# Altium PCB 32-085PCB图（源文件格式）.PcbDoc
Units mil, origin at the board's own origin, x right, y up, seen from the top; angles counter-clockwise.
Board outline 3930 x 3915 mil, 2 copper layers (Top Layer, Bottom Layer); 30 components, 49 nets, 127 pads, 0 vias.
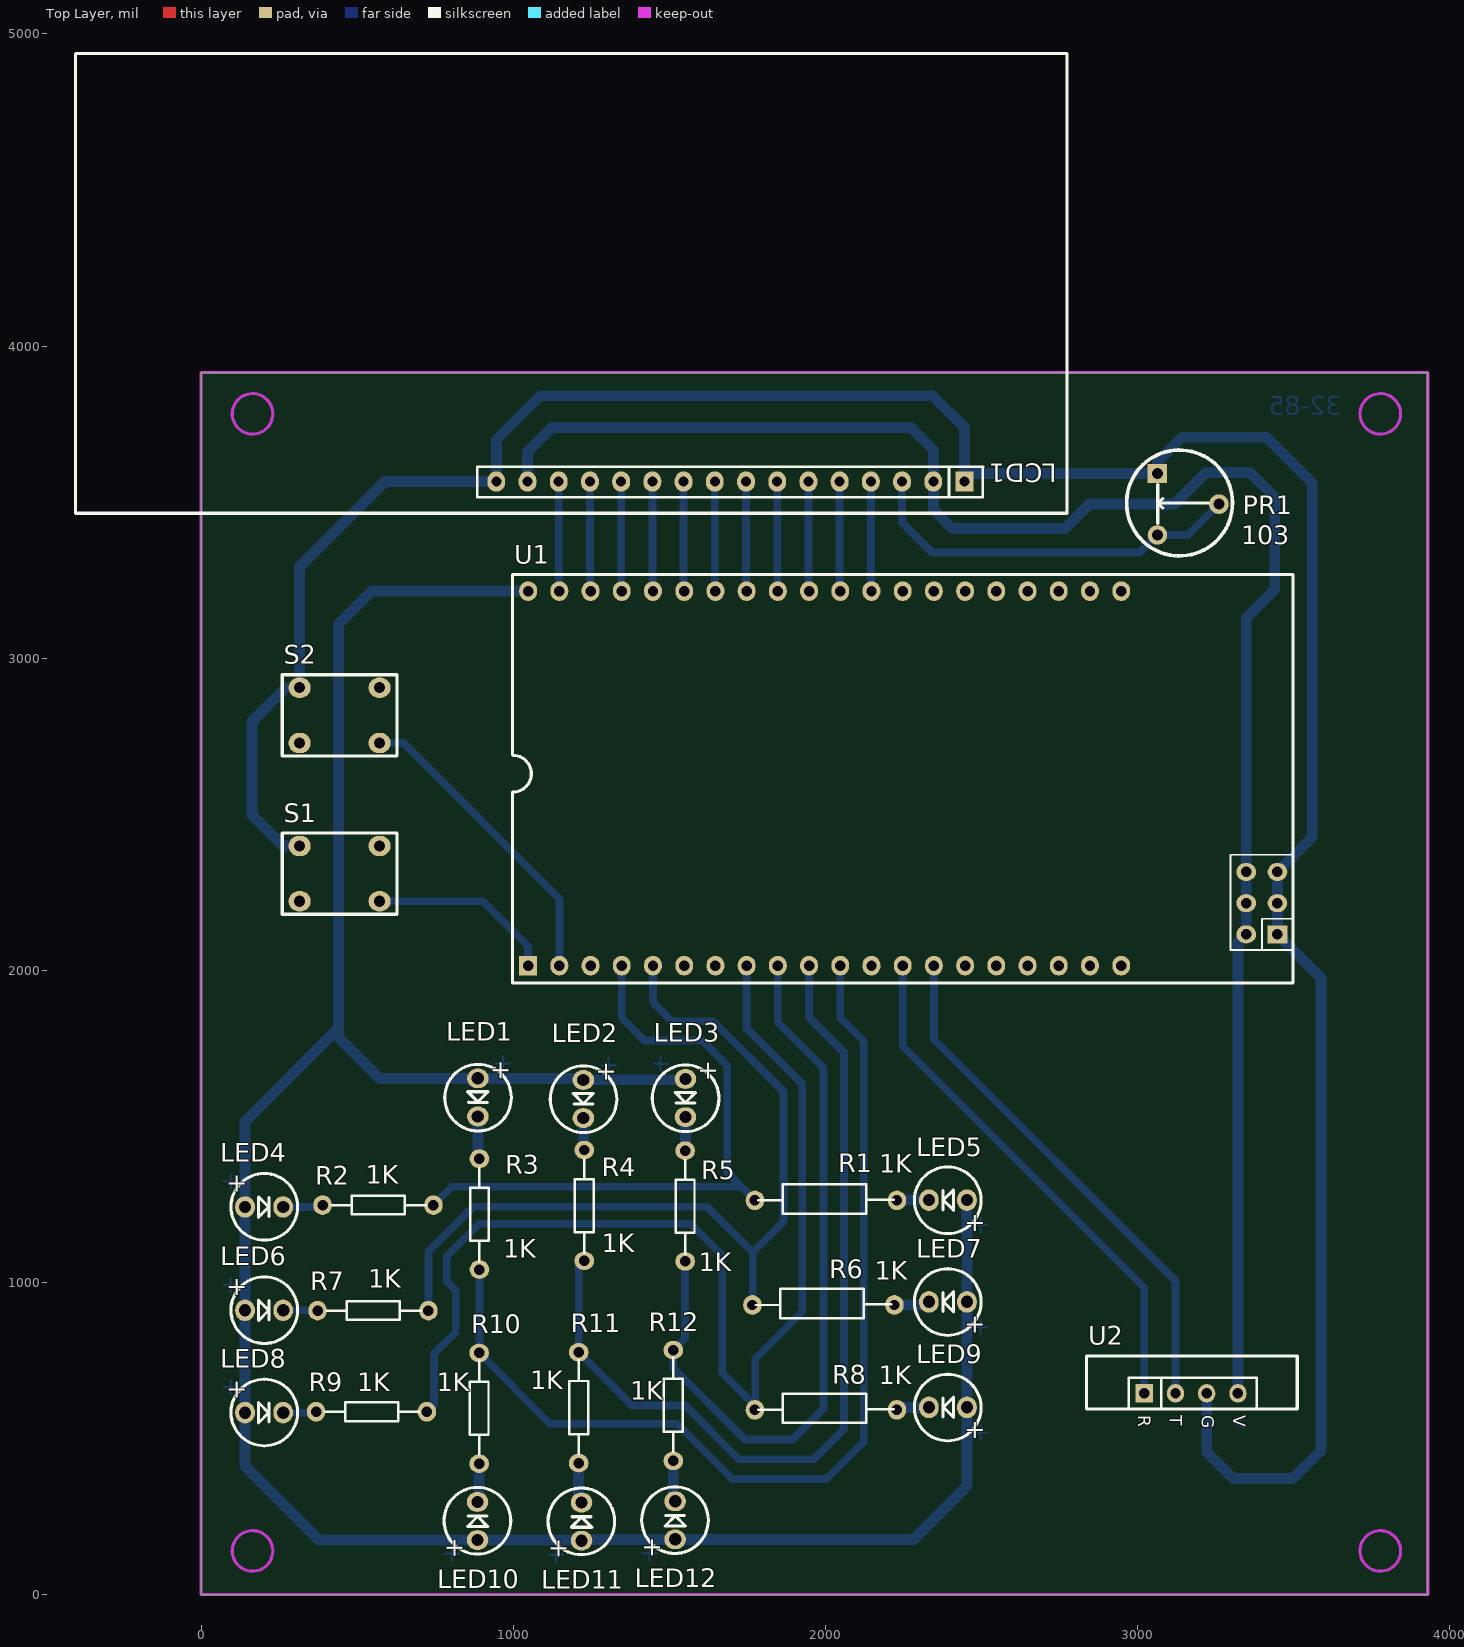
[diagram p0: Top Layer view]
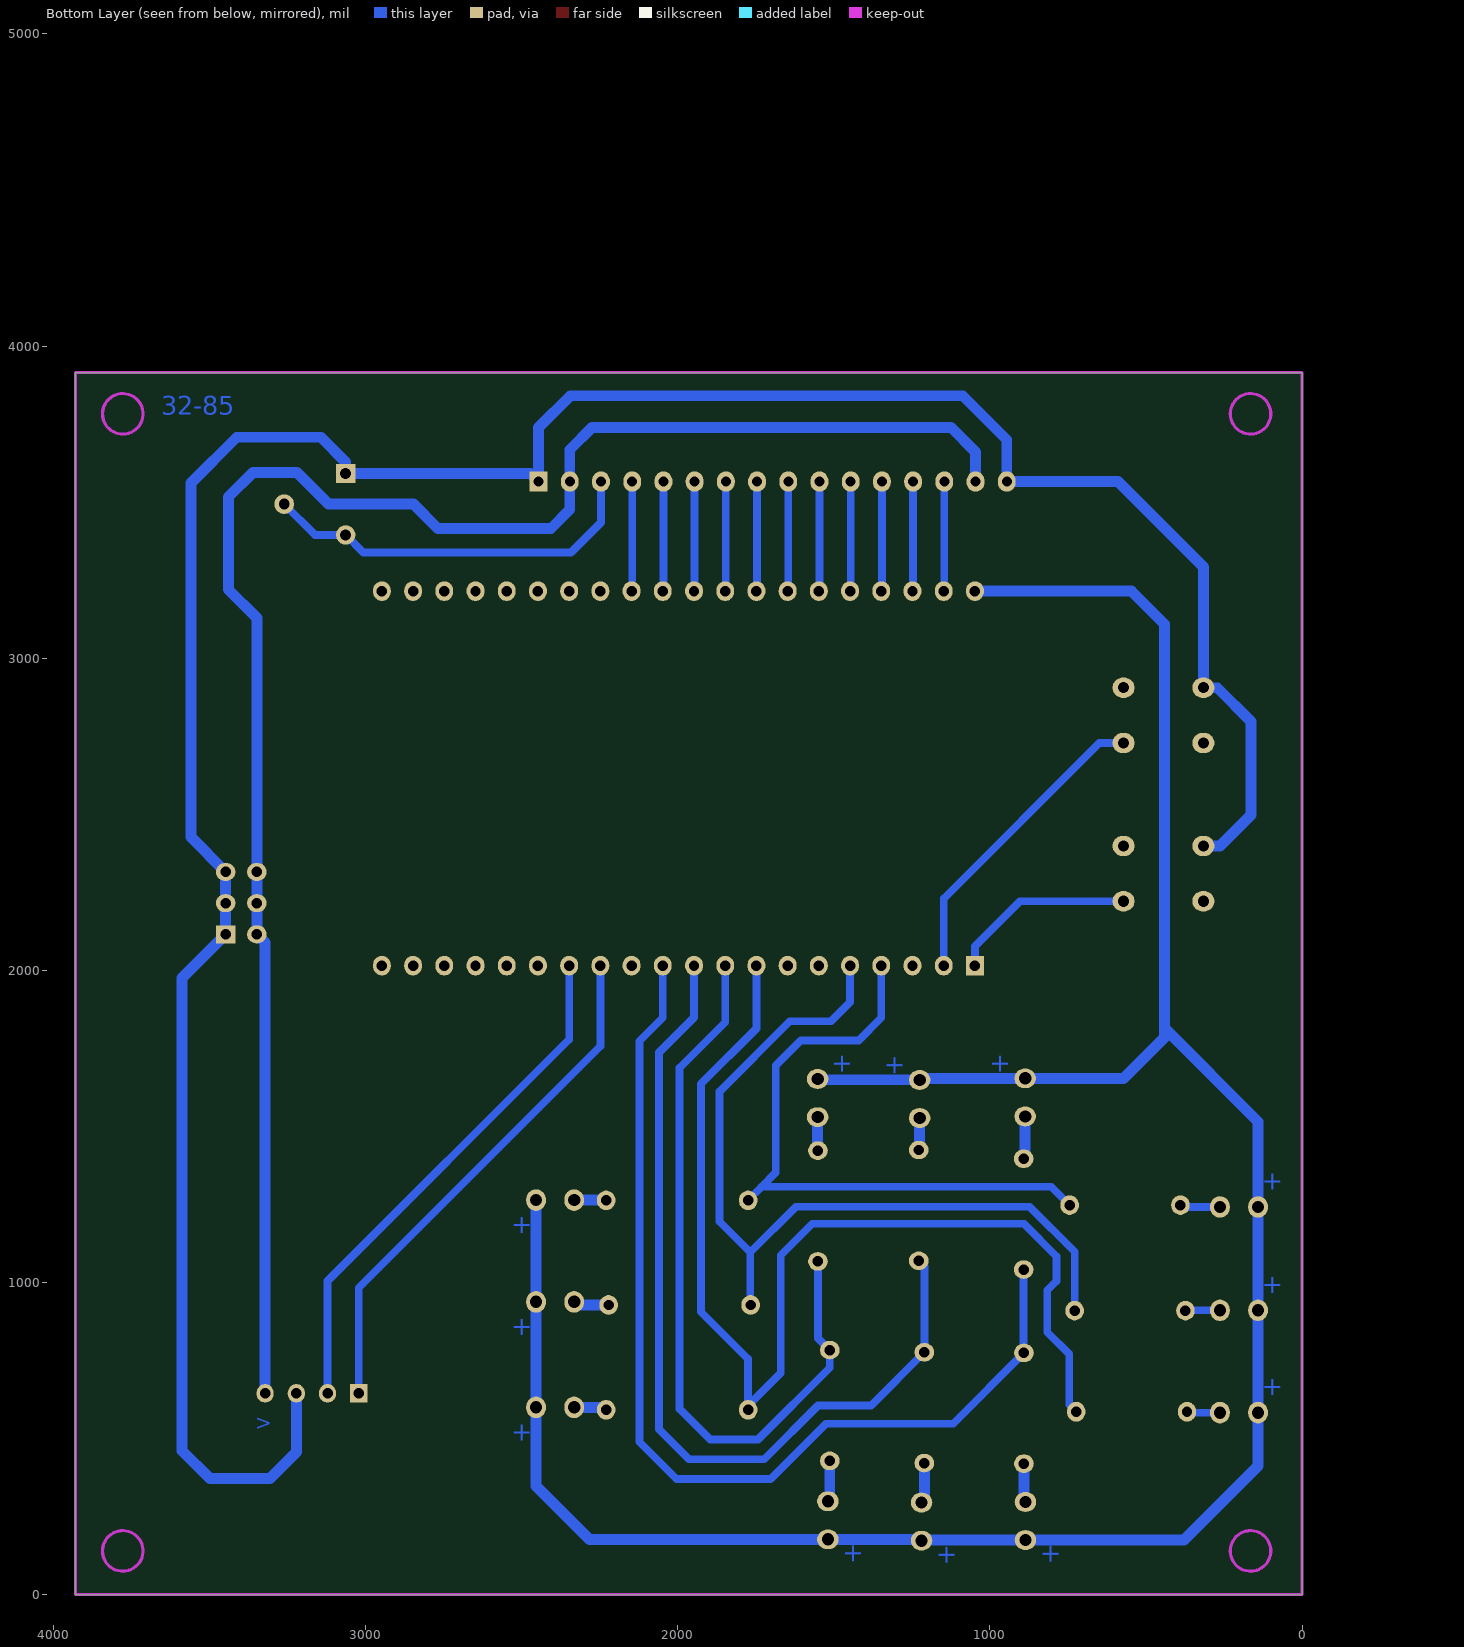
[diagram p1: Bottom Layer view, seen from below]

## Layer stack, top to bottom
Top Solder: solder mask 0.4, Solder Resist, Dk 3.5
Top Layer: signal copper 1.4
Dielectric1: dielectric 12.6, FR-4, Dk 4.8
Bottom Layer: signal copper 1.4
Bottom Solder: solder mask 0.4, Solder Resist, Dk 3.5

## Board outline
0,0 0,3915 3930,3915 3930,0

## Design rules (kind name [scope] priority, off if disabled: settings)
Clearance [All] p1: gap=12
ComponentClearance [All] p1 off: gap=10 collisioncheckmode=3 verticalgap=10 showdistances=FALSE
FabricationTestpoint [(IsPad And (OnTopLayer Or OnBottomLayer))] p1: side=3 testpointundercomponent=TRUE minsize=40 maxsize=100 preferedsize=60 minholesize=0 maxholesize=40 preferedholesize=32 testpointgrid=1 allowsidetop=TRUE allowsidebottom=TRUE usegrid=TRUE gridtolerance=0.01
Height [All] p1 off: minheight=0 maxheight=1000 prefheight=500
HoleSize [All] p1 off: absolutevalues=TRUE maxlimit=100 minlimit=1 maxpercent=80.000 minpercent=20.000
LayerPairs [All] p1 off: enforce=TRUE
PlaneClearance [All] p1 off: clearance=20
PlaneConnect [All] p1 off: planeconnectstyle=Relief reliefexpansion=20 reliefentries=4 reliefconductorwidth=10 reliefairgap=10
PolygonConnect [All] p1 off: connectstyle=Relief reliefconductorwidth=10 reliefentries=4 polygonreliefangle="90 Angle" airgapwidth=10
RoutingVias [All] p1: holewidth=28 width=50 viastyle="Through Hole" minholewidth=28 minwidth=50 maxholewidth=28 maxwidth=50
SilkToSolderMaskClearance SilkscreenOverComponentPads [IsPad] p1: minsilkscreentomaskgap=10 clearancetoexposedcopper=TRUE
SolderMaskExpansion [All] p1: expansion=4
Width [All] p1: maxlimit=100 minlimit=12 preferedwidth=20
22 further rules are at their usual default settings.

## Components (designator, comment, footprint, x,y, rotation, side; value= is the part's Value field where it differs from the comment)
LCD1 "LCD1602" LCD1602 2446,3566 r180 top
LED1 "GREEN" LED_D3MM12 887,1654 r270 top
LED2 "YELLOW" LED_D3MM12 1225,1649 r270 top
LED3 "RED" LED_D3MM12 1552,1652 r270 top
LED4 "GREEN" LED_D3MM12 141,1242 r0 top
LED5 "GREEN" LED_D3MM12 2454,1264 r180 top
LED6 "YELLOW" LED_D3MM12 141,911 r0 top
LED7 "YELLOW" LED_D3MM12 2454,938 r180 top
LED8 "RED" LED_D3MM12 141,583 r0 top
LED9 "RED" LED_D3MM12 2454,600 r180 top
LED10 "GREEN" LED_D3MM12 886,175 r90 top
LED11 "YELLOW" LED_D3MM12 1219,173 r90 top
LED12 "RED" LED_D3MM12 1519,177 r90 top
PR1 "103" WH06-2 3064,3592 r270 top
R1 "1K" AXIAL0.4 2002,1263 r0 top
R2 "1K" AXIAL0.3 567,1248 r180 top
R3 "1K" AXIAL0.3 892,1219 r90 top
R4 "1K" AXIAL0.3 1228,1247 r90 top
R5 "1K" AXIAL0.3 1551,1245 r90 top
R6 "1K" AXIAL0.4 1994,928 r0 top
R7 "1K" AXIAL0.3 551,910 r180 top
R8 "1K" AXIAL0.4 2002,592 r0 top
R9 "1K" AXIAL0.3 546,586 r180 top
R10 "1K" AXIAL0.3 891,597 r270 top
R11 "1K" AXIAL0.3 1210,599 r270 top
R12 "1K" AXIAL0.3 1513,606 r270 top
S1 "BUTTOM" BUTTOM_6x6DIP 444,2310 r0 top
S2 "BUTTOM" BUTTOM_6x6DIP 444,2817 r0 top
U1 "STM32_CORE" STM32_CORE 1048,2015 r90 top
U2 "预留串口" 蓝牙MODE竖放 3022,645 r270 top

## Footprints (in the part's own frame and the unit in brackets; to place one, negate y for a bottom-side part, rotate by r counter-clockwise, add the part's x,y. Pads: shape width x height; smd on the part's side, far side on the other; paste and mask are expansions set on the pad)
AXIAL0.3 [mm]
  oval 1.5x1.6 hole 0.85: 1(-4.508,0) 2(4.508,0)
  silkscreen extent -3.87,-0.76 3.75,0.76
AXIAL0.4 [mm]
  oval 1.5x1.6 hole 0.85: 1(-5.779,0) 2(5.779,0)
  silkscreen extent -5.52,-1.07 5.52,1.32
BUTTOM_6x6DIP [mm]
  oval 1.8x1.65 hole 0.9: 1(-3.25,2.25) 2(3.25,-2.25) ""(-3.25,-2.25) ""(3.25,2.25)
  round 1 on Top Overlay: 3(0,0)
  silkscreen extent -4.67,-3.3 4.67,3.3
LCD1602 [mm]
  rect 1.45x1.65 hole 0.813: 1(0,0)
  oval 1.45x1.65 hole 0.813: 2(2.54,0) 3(5.08,0) 4(7.62,0) 5(10.16,0) 6(12.7,0) 7(15.24,0) 8(17.78,0) 9(20.32,0) 10(22.86,0) 11(25.4,0) 12(27.94,0) 13(30.48,0) 14(33.02,0) 15(35.56,0) 16(38.1,0)
  silkscreen extent -8.33,-34.85 72.35,2.58
LED_D3MM12 [mm]
  oval 1.6x1.75 hole 1: 1(0,0) 2(3.1,0)
  silkscreen extent -1.14,-2.7 4.28,2.72
STM32_CORE [mm]
  rect 1.6x1.45 hole 0.85: 1(0,0)
  oval 1.6x1.45 hole 0.85: 2(0,-2.54) 3(0,-5.08) 4(0,-7.62) 5(0,-10.16) 6(0,-12.7) 7(0,-15.24) 8(0,-17.78) 9(0,-20.32) 10(0,-22.86) 11(0,-25.4) 12(0,-27.94) 13(0,-30.48) 14(0,-33.02) 15(0,-35.56) 16(0,-38.1) 17(0,-40.64) 18(0,-43.18) 19(0,-45.72) 20(0,-48.26) 21(30.48,-48.26) 22(30.48,-45.72) 23(30.48,-43.18) 24(30.48,-40.64) 25(30.48,-38.1) 26(30.48,-35.56) 27(30.48,-33.02) 28(30.48,-30.48) 29(30.48,-27.94) 30(30.48,-25.4) 31(30.48,-22.86) 32(30.48,-20.32) 33(30.48,-17.78) 34(30.48,-15.24) 35(30.48,-12.7) 36(30.48,-10.16) 37(30.48,-7.62) 38(30.48,-5.08) 39(30.48,-2.54) 40(30.48,0)
  rect 1.45x1.6 hole 0.85: 41(2.55,-60.975)
  oval 1.45x1.6 hole 0.85: 42(2.55,-58.435) 43(5.09,-60.975) 44(5.09,-58.435) 45(7.63,-60.975) 46(7.63,-58.435)
  silkscreen extent -1.4,-62.25 31.84,1.27
WH06-2 [mil]
  rect 62x62 hole 35: 1(0,0)
  round 62.99 hole 35: 2(98.43,196.85)
  round 62 hole 35: 3(196.85,0)
  silkscreen extent -75,-98 264,241
蓝牙MODE竖放 [mm]
  rect 1.5x1.4 hole 0.85: 1(0,0)
  oval 1.5x1.4 hole 0.85: 2(0,2.54) 3(0,5.08) 4(0,7.62)
  silkscreen extent -3.05,-4.7 1.27,12.45

## Part data
LCD1: "LCD1602液晶"
LED1 LED2 LED3 LED4 LED5 LED6 LED7 LED8 LED9 LED10 LED11 LED12: library part LED, "LED灯"
PR1: library part PR, "电位器"
R1 R2 R3 R4 R5 R6 R7 R8 R9 R10 R11 R12: library part RES, "电阻"
S1 S2: "按键"
U1: "STM32核心板"
U2: library part 蓝牙MODE

## Nets (pads, with @x,y where several pads share a name; then routed paths per layer and width w, separated by ;. In a path a pad name is that pad's centre, name@x,y a point inside that pad or via, vN(x,y) a via of type N, cw(c..) or ccw(c..) an arc to the next point about the centre after c; other vN are vias at no path point)
GND: LCD1.1 LCD1.16 PR1.1 S1.1 S2.1 U1.41 U1.43 U1.45 U2.3 | length 8814.1
  Bottom Layer w35: S1.1 262.42,2398.58 163,2498 163,2797 271.58,2905.58 S2.1 316.05,3292.05 590,3566 LCD1.16 946,3700 1087,3841 2344,3841 2446,3739 LCD1.1 2472,3592 PR1.1 3064,3629 3143,3708 3413,3708 3560,3561 3560,2426.8 U1.45 U1.43 U1.41 3588,1976 3588,461 3499,372 3307,372 3222,457 U2.3
NetLCD1_3: LCD1.3 PR1.2 PR1.3 | length 1249.6
  Bottom Layer w25: LCD1.3 2246,3435 2342,3339 3007.85,3339 PR1.3 3162.43,3395.15 PR1.2
NetLED1_2: LED1.2 R3.2 | length 137.5
  Bottom Layer w35: LED1.2 887,1401.5 R3.2
NetLED2_2: LED2.2 R4.2 | length 103.7
  Bottom Layer w35: LED2.2 1225,1427.5 R4.2
NetLED3_2: LED3.2 R5.2 | length 107.9
  Bottom Layer w35: R5.2 1552,1423.5 LED3.2
NetLED4_2: LED4.2 R2.2 | length 128.9
  Bottom Layer w25: LED4.2 383.5,1242 R2.2
NetLED5_2: LED5.2 R1.2 | length 102.9
  Bottom Layer w35: R1.2 2230.5,1264 LED5.2
NetLED6_2: LED6.2 R7.2 | length 110.9
  Bottom Layer w25: LED6.2 372.5,911 R7.2
NetLED7_2: LED7.2 R6.2 | length 114.6
  Bottom Layer w35: R6.2 2321.95,928 LED7.2
NetLED8_2: LED8.2 R9.2 | length 106.7
  Bottom Layer w25: LED8.2 365.5,583 R9.2
NetLED9_2: LED9.2 R8.2 | length 105.8
  Bottom Layer w35: R8.2 2237.5,600 LED9.2
NetLED10_2: LED10.2 R10.2 | length 124.5
  Bottom Layer w35: LED10.2 891,302.05 R10.2
NetLED11_2: LED11.2 R11.2 | length 130.2
  Bottom Layer w35: R11.2 1210,304.05 LED11.2
NetLED12_2: LED12.2 R12.2 | length 123.5
  Bottom Layer w35: LED12.2@1513,305.05 R12.2
PA0: R1.1 R2.1 U1.4 | length 2048.9
  Bottom Layer w25: R2.1 803.5,1307 1731.5,1307 ; U1.4 1348,1848 1420.5,1775.5 1605.5,1775.5 1686,1695 1686,1352.5 1731.5,1307 ; R1.1@1775.5,1263 1731.5,1307
PA1: R6.1 R7.1 U1.5 | length 2726.3
  Bottom Layer w25: R7.1 728.5,1098.5 873,1243 1621,1243 1767.5,1096.5 ; U1.5 1448,1898 1509,1837 1641,1837 1866,1612 1866,1195 1767.5,1096.5 ; R6.1@1767.5,928 1767.5,1096.5
PA2: U1.6
PA3: U1.7
PA4: R8.1 R9.1 U1.8 | length 3589
  Bottom Layer w25: R9.1 746,608.5 746,771 816,841 816,975 787,1004 787,1084 891,1188 1569,1188 1670,1087 1670,710 1775.5,604.5 1775.5,755.5 1926,906 1926,1636 1748,1814 U1.8
PA5: R5.1 R12.1 U1.9 | length 2453.6
  Bottom Layer w25: R5.1 1551,821.5 R12.1 1513,727 1743,497 1896,497 1994,595 1994,1688 1848,1834 U1.9
PA6: R4.1 R11.1 U1.10 | length 2863.5
  Bottom Layer w25: R4.1 1210,1051.5 R11.1 1380.5,606 1551,606 1723,434 1964,434 2060,530 2060,1737 1948,1849 U1.10
PA7: R3.1 R10.1 U1.11 | length 3272.7
  Bottom Layer w25: R3.1 892,775.5 R10.1 1117.75,547.75 1525.25,547.75 1703,370 2003,370 2123,490 2123,1773 2048,1848 U1.11
PA8: U1.12
PA9: U1.13 U2.1 | length 1690.6
  Bottom Layer w25: U1.13 2248,1757 3022,983 U2.1
PA10: U1.14 U2.2 | length 1690.6
  Bottom Layer w25: U1.14 2348,1779 3122,1005 U2.2
PA11: U1.15
PA12: U1.16
PA15: U1.17
PB0: U1.24
PB1: U1.25
PB2: U1.26
PB3: U1.27
PB4: U1.28
PB5: LCD1.4 U1.29 | length 349
  Bottom Layer w25: U1.29@2146,3217 LCD1.4
PB6: LCD1.5 U1.30 | length 351.8
  Bottom Layer w25: LCD1.5 2046,3217 U1.30
PB7: LCD1.6 U1.31 | length 351.8
  Bottom Layer w25: LCD1.6 1946,3217 U1.31
PB8: LCD1.7 U1.32 | length 351.8
  Bottom Layer w25: LCD1.7 1846,3217 U1.32
PB9: LCD1.8 U1.33 | length 351.8
  Bottom Layer w25: LCD1.8 1746,3217 U1.33
PB10: LCD1.9 U1.34 | length 351.8
  Bottom Layer w25: LCD1.9 1646,3217 U1.34
PB11: LCD1.10 U1.35 | length 351.8
  Bottom Layer w25: LCD1.10 1546,3217 U1.35
PB12: LCD1.11 U1.36 | length 351.8
  Bottom Layer w25: LCD1.11 1446,3217 U1.36
PB13: LCD1.12 U1.37 | length 351.8
  Bottom Layer w25: LCD1.12 1346,3217 U1.37
PB14: LCD1.13 U1.38 | length 351.8
  Bottom Layer w25: LCD1.13 1246,3217 U1.38
PB15: LCD1.14 U1.39 | length 351.8
  Bottom Layer w25: LCD1.14 1146,3217 U1.39
PC13: S1.2 U1.1 | length 597.9
  Bottom Layer w25: S1.2 903.58,2221.42 1048,2077 U1.1
PC14: S2.2 U1.2 | length 997.5
  Bottom Layer w25: S2.2 649.58,2728.42 1148,2230 U1.2
PC15: U1.3
VCC_3.3V: LED1.1 LED2.1 LED3.1 LED4.1 LED5.1 LED6.1 LED7.1 LED8.1 LED9.1 LED10.1 LED11.1 LED12.1 U1.40 | length 8072
  Bottom Layer w35: U1.40 547,3215 441,3109 441,1815 ; LED2.1 1225.51,1649.51 1549.51,1649.51 LED3.1 ; LED2.1@1225,1652 1222,1652 1220,1654 LED1.1 572,1654 441,1785 441,1815 ; LED5.1 LED7.1 LED9.1 2454,348 2283,177 LED12.1 1518.49,176.49 1219,176.49 LED11.1 1217,175 LED10.1 378,175 141,412 LED8.1 LED6.1 LED4.1 141,1515 441,1815
VCC_5V: LCD1.2 LCD1.15 U1.42 U1.44 U1.46 U2.4 | length 5795.1
  Bottom Layer w35: LCD1.15 1046,3661 1124,3739 2275,3739 2346,3668 LCD1.2 2346,3476 2407,3415 2768,3415 2847,3494 3119,3494 3220,3595 3361,3595 3440,3516 3440,3220 3348.6,3128.6 U1.46 U1.44 U1.42 3322,2088.8 U2.4
pads on no net: S1. S1.3 S2. S2.3 U1.18 U1.19 U1.20 U1.21 U1.22 U1.23

## Keep-outs
Keep-Out Layer:
  circle w10: c3778.04,140 r64.96
  circle w10: c3778.04,3783 r64.96
  circle w10: c165.04,3783 r64.96
  circle w10: c165.04,140 r64.96
  lines w10: 0,0 0,3915 3930,3915 3930,0 0,0

## Other copper
Bottom Layer:
  text "32-85" at 3655,3780 h60

## Dimensions
3930,3922 to 0,3915 on Top Overlay
-1,3907 to 6,-2 on Top Overlay

## Text inside footprints (layer, text, board x,y; h text height)
LED1: Bottom Layer "+" at 942,1734 h60 r270; Top Overlay "+" at 935,1714 h60 r270
LED2: Bottom Layer "+" at 1280,1729 h60 r270; Top Overlay "+" at 1273,1709 h60 r270
LED3: Bottom Layer "+" at 1447,1735 h60 r270; Top Overlay "+" at 1600,1712 h60 r270
LED4: Bottom Layer "+" at 61,1297 h60; Top Overlay "+" at 81,1290 h60
LED5: Bottom Layer "+" at 2534,1209 h60 r180; Top Overlay "+" at 2514,1216 h60 r180
LED6: Bottom Layer "+" at 61,966 h60; Top Overlay "+" at 81,959 h60
LED7: Bottom Layer "+" at 2534,883 h60 r180; Top Overlay "+" at 2514,890 h60 r180
LED8: Bottom Layer "+" at 61,638 h60; Top Overlay "+" at 81,631 h60
LED9: Bottom Layer "+" at 2534,545 h60 r180; Top Overlay "+" at 2514,552 h60 r180
LED10: Bottom Layer "+" at 831,95 h60 r90; Top Overlay "+" at 838,115 h60 r90
LED11: Bottom Layer "+" at 1164,93 h60 r90; Top Overlay "+" at 1171,113 h60 r90
LED12: Bottom Layer "+" at 1464,97 h60 r90; Top Overlay "+" at 1471,117 h60 r90
U2: Bottom Layer "V" at 3307,530 h40 r270; Top Overlay "T" at 3103.67,575 h40 r270; Top Overlay "G" at 3205.33,575 h40 r270; Top Overlay "R" at 3002,575 h40 r270; Top Overlay "V" at 3307,575 h40 r270